# EAGLE board tic_tac_toe_wire (EAGLE 6.4)
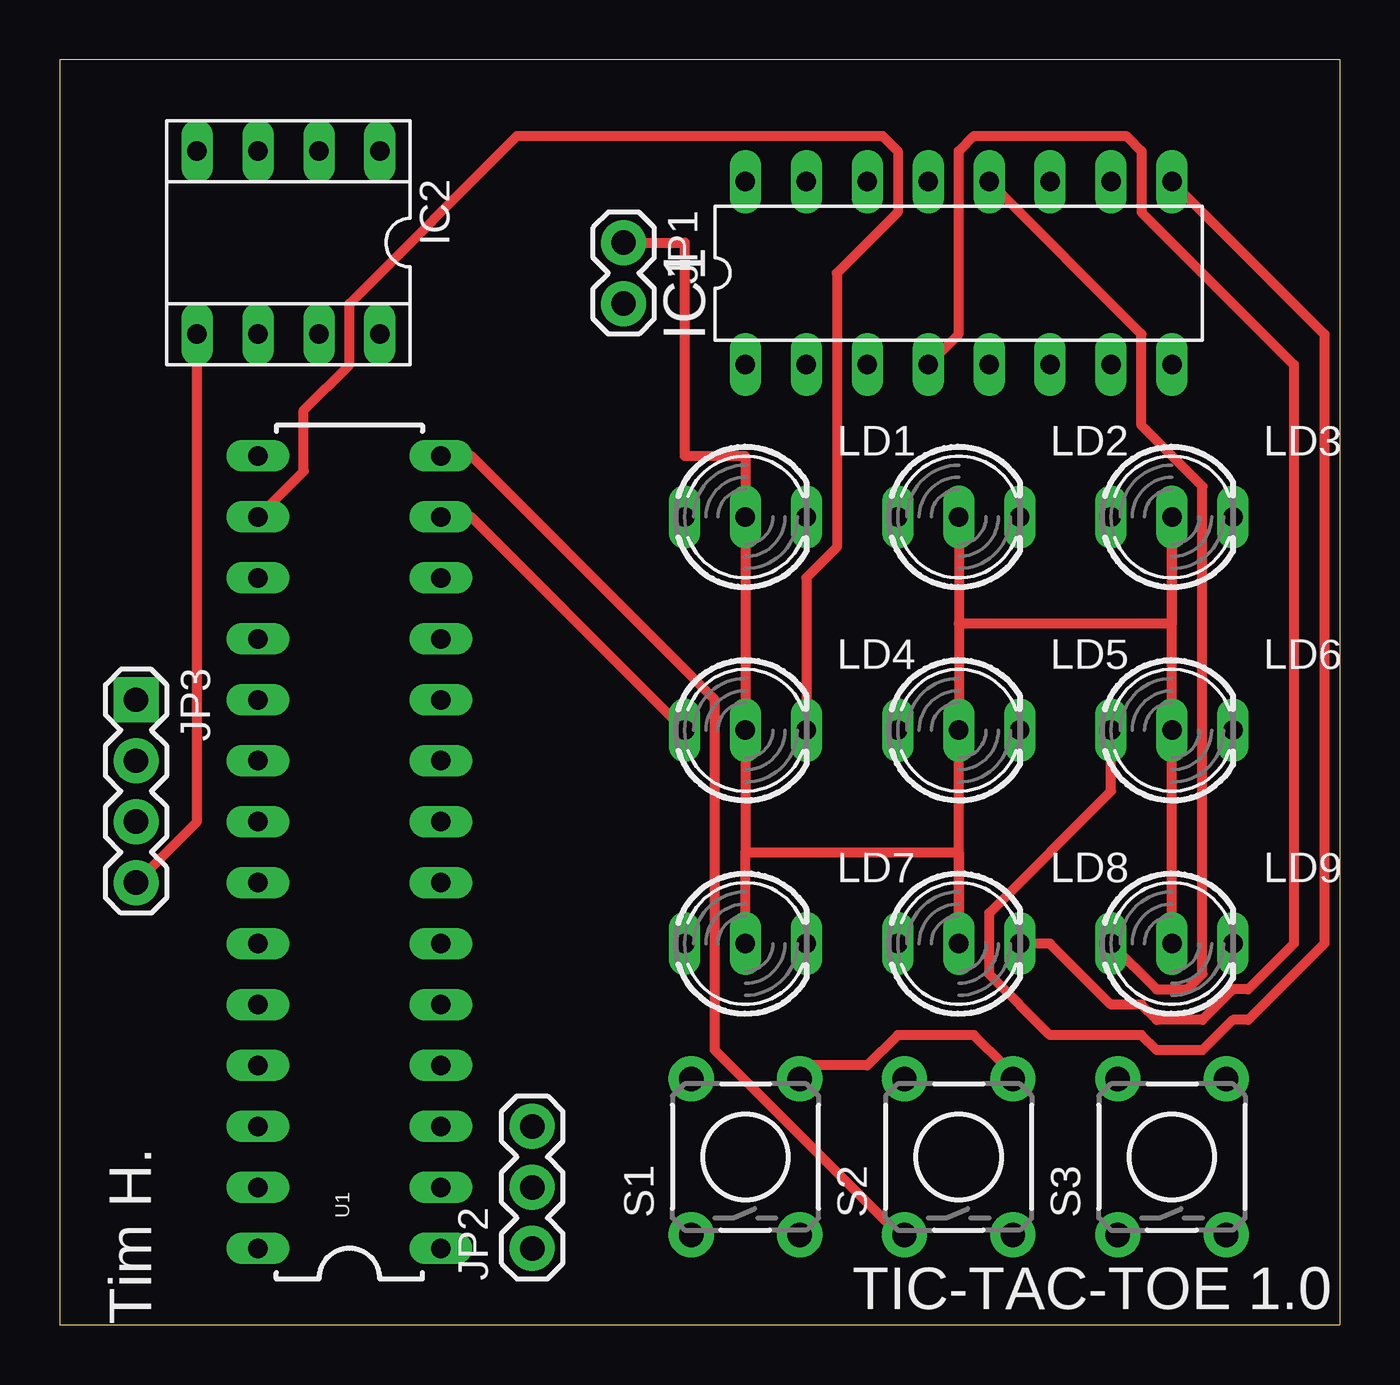
[diagram p0: board, top side]
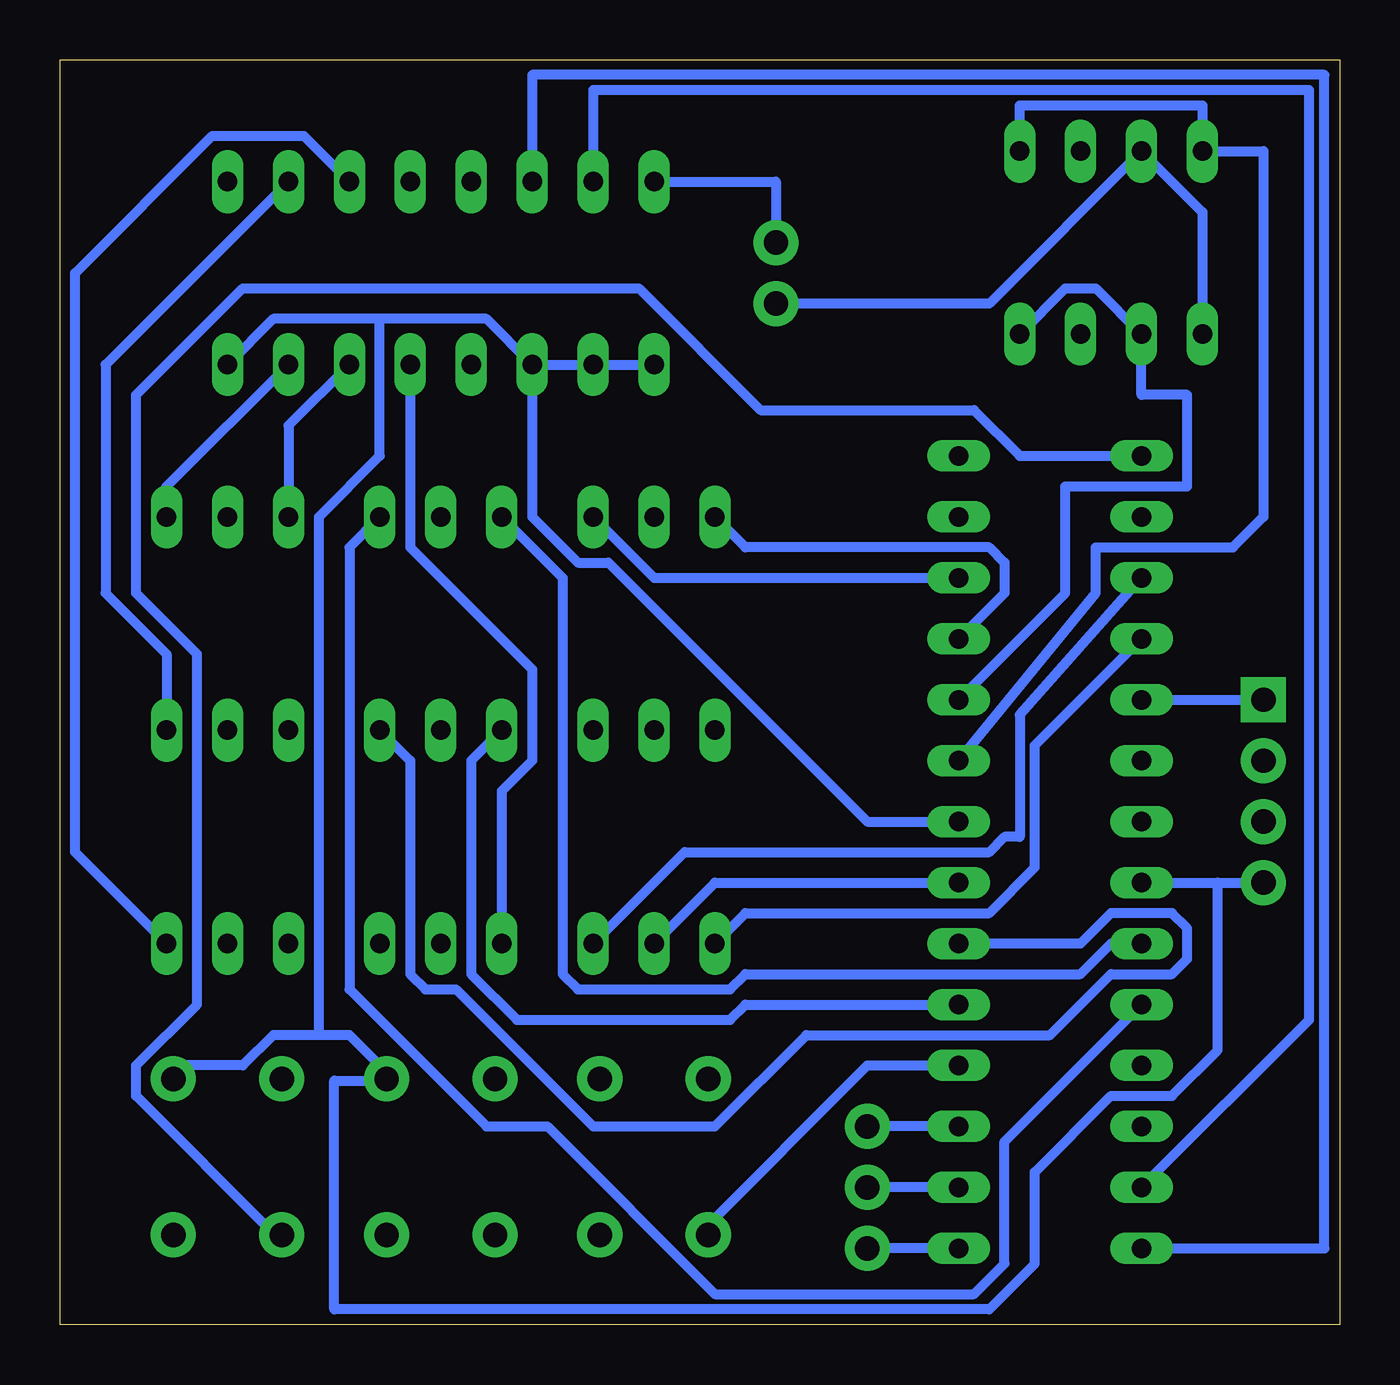
[diagram p1: board, bottom side, seen from below]

Size 53.34 x 52.7 mm. Coordinates in mm from the lower left corner, seen from the top.
Outline: 0,0 53.34,0 53.34,52.7 0,52.7 0,0
Copper layers (1*16): Top 0.035mm / dielectric 1.5mm / Bottom 0.035mm
Design rules "default": minimum track width 10mil, minimum drill 24mil, track to track 8mil, track to pad 8mil, pad to pad 8mil, via to via 8mil, smd to smd 8mil, copper to edge 40mil, drill to drill 8mil, minimum pad ring 10mil, minimum via ring 8mil, stop-mask expansion 4mil, vias tented up to drill 0mil, thermal gap 10mil
Net classes: 0 default: width 0.406 mm, drill 0.508 mm, clearance 0.254 mm

## Footprints (pad centres in the part's own frame; a part is rotated, then mirrored left to right if it is on the bottom)
DIL16 = drill 0.813 long: 1 -8.89,-3.81; 2 -6.35,-3.81; 3 -3.81,-3.81; 4 -1.27,-3.81; 5 1.27,-3.81; 6 3.81,-3.81; 7 6.35,-3.81; 8 8.89,-3.81; 9 8.89,3.81; 10 6.35,3.81; 11 3.81,3.81; 12 1.27,3.81; 13 -1.27,3.81; 14 -3.81,3.81; 15 -6.35,3.81; 16 -8.89,3.81
SOCKET-08 = drill 0.813 long: 1 -3.81,-3.81; 2 -1.27,-3.81; 3 1.27,-3.81; 4 3.81,-3.81; 5 3.81,3.81; 6 1.27,3.81; 7 -1.27,3.81; 8 -3.81,3.81
1X02 = drill 1.016 pad 1.88: 1 0,0; 2 2.54,0
1X03 = drill 1.016 pad 1.88: 1 0,0; 2 2.54,0; 3 5.08,0
1X04 = drill 1.016 pad 1.88 square: 1 0,0 | drill 1.016 pad 1.88: 2 2.54,0; 3 5.08,0; 4 7.62,0
DUOLED-C-5MM = drill 0.813 long: AR 2.54,0; AX -2.54,0; C 0,0
TACTILE-PTH = drill 1.016 pad 1.88: 1 -3.251,2.261; 2 3.251,2.261; 3 -3.251,-2.261; 4 3.251,-2.261
DIL28-3 = drill 0.813 long: 1 -16.51,-3.81; 2 -13.97,-3.81; 3 -11.43,-3.81; 4 -8.89,-3.81; 5 -6.35,-3.81; 6 -3.81,-3.81; 7 -1.27,-3.81; 8 1.27,-3.81; 9 3.81,-3.81; 10 6.35,-3.81; 11 8.89,-3.81; 12 11.43,-3.81; 13 13.97,-3.81; 14 16.51,-3.81; 15 16.51,3.81; 16 13.97,3.81; 17 11.43,3.81; 18 8.89,3.81; 19 6.35,3.81; 20 3.81,3.81; 21 1.27,3.81; 22 -1.27,3.81; 23 -3.81,3.81; 24 -6.35,3.81; 25 -8.89,3.81; 26 -11.43,3.81; 27 -13.97,3.81; 28 -16.51,3.81

## Placement (x,y rotation side)
IC1  PCF8574P  [DIL16]  37.47,43.81 0 top
IC2  [SOCKET-08]  9.53,45.09 180 top
JP1  M02PTH  [1X02]  23.5,45.09 270 top
JP2  [1X03]  19.68,3.17 90 top
JP3  [1X04]  3.17,26.04 270 top
LD1  [DUOLED-C-5MM]  28.57,33.66 0 top
LD2  [DUOLED-C-5MM]  37.47,33.66 0 top
LD3  [DUOLED-C-5MM]  46.35,33.66 0 top
LD4  [DUOLED-C-5MM]  28.57,24.77 0 top
LD5  [DUOLED-C-5MM]  37.47,24.77 0 top
LD6  [DUOLED-C-5MM]  46.35,24.77 0 top
LD7  [DUOLED-C-5MM]  28.57,15.88 0 top
LD8  [DUOLED-C-5MM]  37.47,15.88 0 top
LD9  [DUOLED-C-5MM]  46.35,15.88 0 top
S1  [TACTILE-PTH]  28.57,6.99 90 top
S2  [TACTILE-PTH]  37.47,6.99 90 top
S3  [TACTILE-PTH]  46.35,6.99 90 top
U1  ATMEGA328P_PDIP  [DIL28-3]  12.06,19.68 90 top

## Library data of the parts
IC1 = micro-philips; MPN: PCF8574PN; OC_FARNELL: 204020; OC_NEWARK: 11N8515
IC2 = ic-package
JP1-JP3 = SparkFun-Connectors
LD1-LD9 = led
S1-S3 = SparkFun-Electromechanical
U1 = SparkFun-DigitalIC

## Nets
GND: IC1.1 IC1.2 IC1.3 IC1.8 IC2.3 IC2.5 JP1.2 JP3.4 S1.4 S2.4 S3.4 U1.8 U1.22
N$1: S1.1 U1.4
N$2: S2.1 U1.14
N$3: S3.1 U1.15
N$4: IC1.14 U1.28
N$5: IC1.15 U1.27
N$6: JP2.2 U1.2
N$7: JP2.1 U1.1
N$8: JP2.3 U1.3
N$10: JP3.1 U1.19
N$12: IC2.6 IC2.8 U1.10
N$13: IC2.1 IC2.4 U1.9
N$15: IC1.12 LD9.AX
N$16: IC1.11 LD9.AR
N$17: IC1.10 LD6.AR
N$18: IC1.9 LD6.AX
N$19: IC1.7 LD3.AR
N$20: IC1.6 LD3.AX
N$21: IC1.5 LD8.AX
N$22: IC1.4 LD8.AR
N$23: LD7.AX U1.18
N$24: LD7.AR U1.17
N$25: LD4.AR U1.16
N$26: LD4.AX U1.13
N$27: LD1.AR U1.12
N$28: LD1.AX U1.11
N$29: LD5.AR U1.6
N$30: LD5.AX U1.5
N$31: LD2.AX U1.23
N$32: LD2.AR U1.24
VCC: IC1.16 JP1.1 LD1.C LD2.C LD3.C LD4.C LD5.C LD6.C LD7.C LD8.C LD9.C U1.7

## Tracks (layer width: path | path; a pad name or v marks a point on that pad's centre or on a via)
GND
  Top 0.406: S1.4 31.11,10.79 33.66,10.79 34.92,12.06 38.1,12.06 39.37,10.79 S2.4 | IC2.5 5.71,20.95 JP3.4
  Bottom 0.406: U1.22 5.08,18.41 | 5.08,18.41 JP3.4 | IC1.1 IC1.2 IC1.3 | U1.8 19.68,20.95 30.48,31.75 31.75,31.75 33.66,33.66 IC1.3 | IC1.8 44.45,41.91 40.01,41.91 | 40.01,41.91 35.56,41.91 IC1.3 | IC2.5 5.71,46.35 IC2.3 14.61,42.55 JP1.2 | 42.55,12.06 41.27,12.06 40.01,10.79 S2.4 | 42.55,12.06 44.45,12.06 45.72,10.79 48.26,10.79 S3.4 | 5.08,18.41 5.08,11.43 6.99,9.53 9.53,9.53 12.7,6.35 12.7,2.54 14.61,0.64 41.91,0.64 41.91,10.16 39.8,10.16 S2.4 | 39.37,10.16 S2.4 | 40.01,41.91 40.01,36.2 42.55,33.66 42.55,12.06
N$1
  Bottom 0.406: U1.4 19.68,10.79 26.67,3.81 S1.1
N$2
  Top 0.406: U1.14 17.14,36.2 27.3,26.04 27.3,11.43 34.92,3.81 S2.1
N$3
  Bottom 0.406: U1.15 13.34,36.2 15.24,38.1 24.13,38.1 29.21,43.18 45.72,43.18 50.16,38.73 50.16,30.48 47.62,27.94 47.62,13.34 50.16,10.79 50.16,9.53 44.45,3.81 S3.1
N$4
  Bottom 0.406: U1.28 0.64,3.17 0.64,52.07 33.66,52.07 IC1.14
N$5
  Bottom 0.406: U1.27 1.27,12.7 1.27,51.44 31.11,51.44 IC1.15
N$6
  Bottom 0.406: U1.2 JP2.2
N$7
  Bottom 0.406: U1.1 JP2.1
N$8
  Bottom 0.406: U1.3 JP2.3
N$10
  Bottom 0.406: U1.19 JP3.1
N$12
  Bottom 0.406: IC2.8 11.43,43.18 10.16,43.18 IC2.6 8.26,38.73 6.35,38.73 6.35,34.92 11.43,34.92 11.43,30.48 U1.10
N$13
  Bottom 0.406: U1.9 10.16,30.48 10.16,32.38 4.45,32.38 3.17,33.66 3.17,48.9 IC2.4 5.71,50.8 13.34,50.8 IC2.1
N$15
  Top 0.406: IC1.12 45.09,41.27 45.09,37.47 47.62,34.92 47.62,14.61 46.99,13.97 45.72,13.97 LD9.AX
N$16
  Bottom 0.406: IC1.11 43.18,49.53 46.99,49.53 52.7,43.81 52.7,19.68 LD9.AR
N$17
  Bottom 0.406: LD6.AR 48.9,27.94 51.44,30.48 51.44,40.01 IC1.10
N$18
  Top 0.406: LD6.AX 43.81,22.23 38.73,17.14 38.73,14.61 41.27,12.06 45.09,12.06 45.72,11.43 47.62,11.43 48.9,12.7 49.53,12.7 52.7,15.88 52.7,41.27 IC1.9
N$19
  Bottom 0.406: LD3.AR 48.9,34.92 IC1.7
N$20
  Bottom 0.406: LD3.AX 43.81,37.47 IC1.6
N$21
  Bottom 0.406: LD8.AX 34.92,22.23 33.66,23.5 33.66,27.3 38.73,32.38 IC1.5
N$22
  Top 0.406: LD8.AR 41.27,15.88 43.81,13.34 45.09,13.34 45.72,12.7 47.62,12.7 48.9,13.97 49.53,13.97 51.44,15.88 51.44,40.01 45.09,46.35 45.09,48.9 44.45,49.53 38.1,49.53 37.47,48.9 37.47,41.27 IC1.4
N$23
  Bottom 0.406: U1.18 12.7,24.13 12.7,19.05 14.61,17.14 24.77,17.14 LD7.AX
N$24
  Bottom 0.406: LD7.AR 27.3,19.68 14.61,19.68 13.97,20.32 13.34,20.32 13.34,25.4 U1.17
N$25
  Top 0.406: LD4.AR 31.11,31.11 32.38,32.38 32.38,43.81 34.92,46.35 34.92,48.9 34.29,49.53 19.05,49.53 12.06,42.55 12.06,40.01 10.16,38.1 10.16,35.56 U1.16
N$26
  Top 0.406: LD4.AX 17.14,33.66 U1.13
N$27
  Bottom 0.406: U1.12 28.57,31.11 LD1.AR
N$28
  Bottom 0.406: U1.11 13.97,30.48 13.97,31.75 14.61,32.38 24.77,32.38 LD1.AX
N$29
  Bottom 0.406: U1.6 10.79,15.88 9.53,17.14 6.99,17.14 6.35,16.51 6.35,15.24 6.99,14.61 9.53,14.61 12.06,12.06 22.23,12.06 26.04,8.26 31.11,8.26 36.83,13.97 38.1,13.97 38.73,14.61 38.73,23.5 LD5.AR
N$30
  Bottom 0.406: U1.5 24.77,13.34 25.4,12.7 34.29,12.7 36.2,14.61 36.2,23.5 LD5.AX
N$31
  Bottom 0.406: U1.23 9.53,15.88 10.79,14.61 24.77,14.61 25.4,13.97 31.75,13.97 32.38,14.61 32.38,31.11 LD2.AX
N$32
  Bottom 0.406: U1.24 13.97,7.62 13.97,2.54 15.24,1.27 26.04,1.27 33.02,8.26 35.56,8.26 41.27,13.97 41.27,32.38 LD2.AR
VCC
  Top 0.406: 28.57,19.68 LD4.C LD1.C 28.57,36.2 26.04,36.2 26.04,45.09 JP1.1 | LD7.C 28.57,19.68 | 28.57,19.68 37.47,19.68 LD8.C LD5.C 37.47,29.21 | LD2.C 37.47,29.21 | LD9.C LD6.C LD3.C 46.35,29.21 37.47,29.21
  Bottom 0.406: IC1.16 23.5,47.62 JP1.1 | U1.7 26.04,18.41 LD7.C

## Text on the board
tPlace: TIC-TAC-TOE 1.0 | Tim H.